# Altium PCB PCB1.PcbDoc (part 3 of 4)
Units mm, origin at the board's own origin, x right, y up, seen from the top; angles counter-clockwise.
Board outline 200 x 55 mm, 4 copper layers (Top Layer, Power Layer, GND Layer, Bottom Layer), stack 1.714 mm thick; 403 components, 272 nets, 1346 pads, 787 vias.
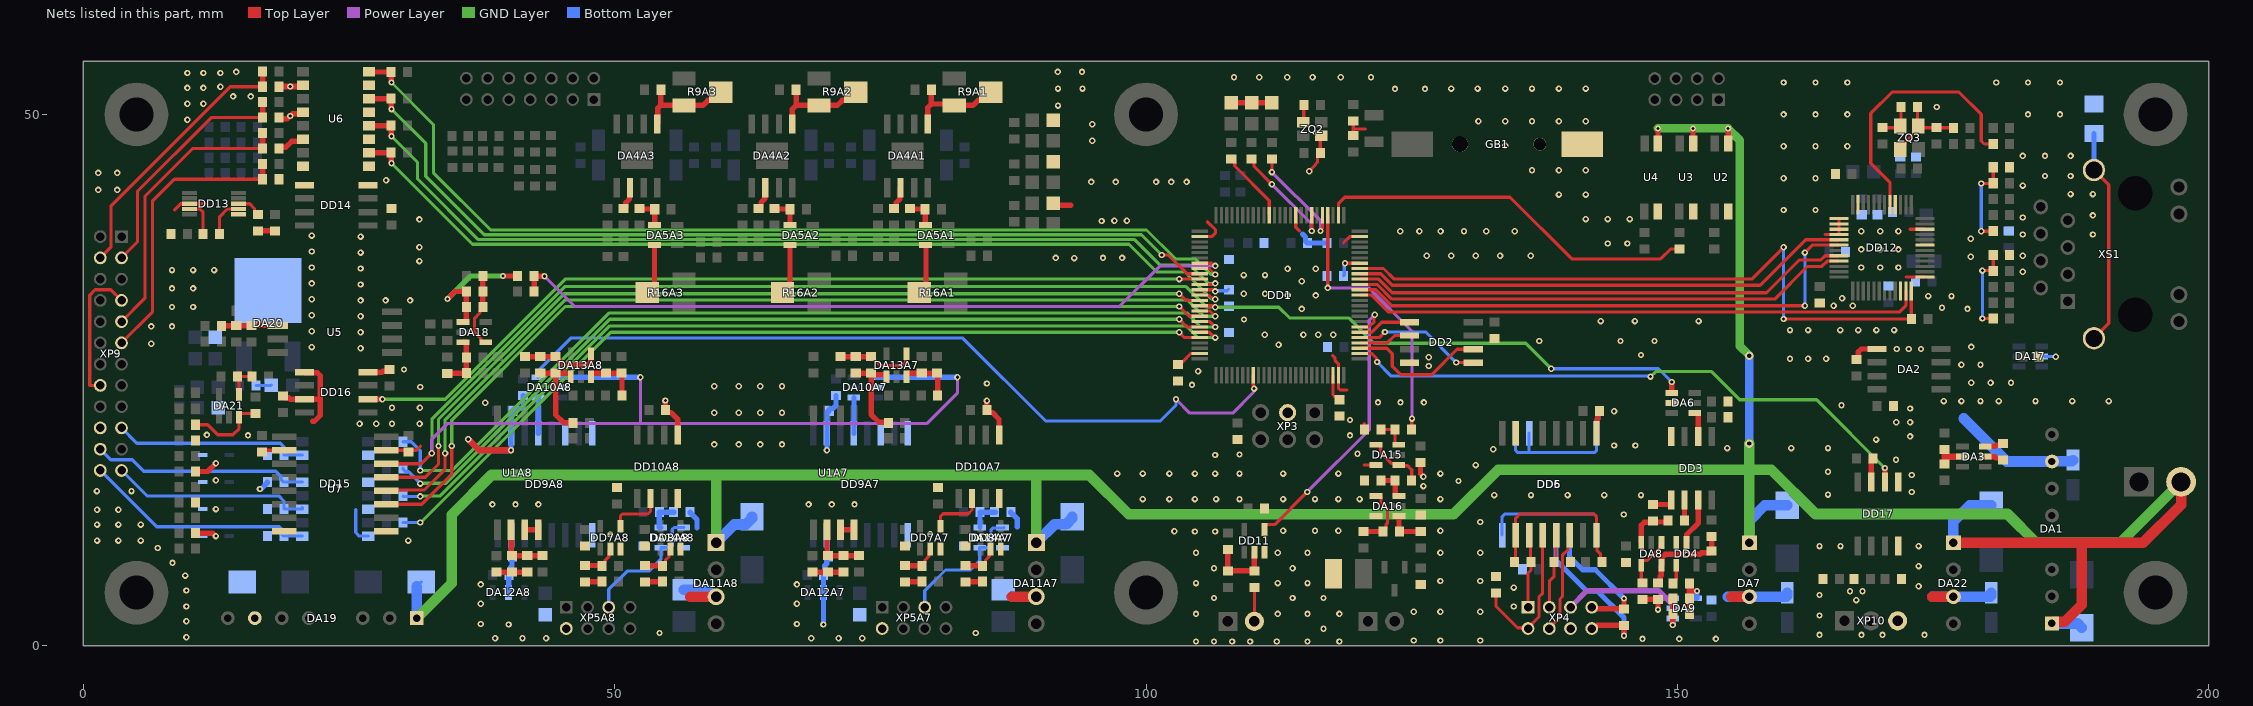
[diagram p5: the nets of this part, all layers, seen from the top]

## Via types
v1: diameter 0.6, hole 0.3, Top Layer to Bottom Layer, tented both sides, 747 vias
v2: diameter 0.6, hole 0.3, Top Layer to Bottom Layer, 36 vias
v3: diameter 0.8, hole 0.4, Top Layer to Bottom Layer, tented both sides, 4 vias

## Nets (pads, with @x,y where several pads share a name; then routed paths per layer and width w, separated by ;. In a path a pad name is that pad's centre, name@x,y a point inside that pad or via, vN(x,y) a via of type N, cw(c..) or ccw(c..) an arc to the next point about the centre after c; other vN are vias at no path point) (continued)
DRV2_SEL_DIG: DA10A8.6 DD1.58 | length 76.6
  Top Layer w0.3: DD1.58@110.1,25.475 110.1,24.356 110.175,24.281 v1(110.175,24.2)
  Power Layer w0.3: v1(102.825,23.2) 104.132,21.893 108.159,21.893 110.118,23.852 110.118,24.143 v1(110.175,24.2)
  Bottom Layer w0.3: DA10A8.6@42.8,25.275 42.8,25.875 45.875,28.95 82.763,28.95 90.563,21.15 101.35,21.15 102.82,22.62 102.82,23.195 v1(102.825,23.2)
EMIS_IND: DD1.2 R48.2 | length 36.2
  Top Layer w0.3: DD1.2@118.1,40.525 118.1,41.607 118.693,42.2 134.256,42.2 140.056,36.4 148.425,36.4 149.35,37.325 R48.2@150.2,37.325
ETH_CS: DD1.92 DD12.29 | length 47.3
  Top Layer w0.3: DD1.92@120.125,35 122.1,35 123.175,33.925 157.789,33.925 162.064,38.2 DD12.29@165.2,38.2
ETH_INT: DD1.88 DD12.47 | length 53.7
  Top Layer w0.3: DD1.88@120.125,33 121.25,33 122.85,31.4 170.89,31.4 171.5,32.01 DD12.47@171.5,33.4
ETH_MISO: DD1.90 DD12.33 | length 47.1
  Top Layer w0.3: DD1.90@120.125,34 121.761,34 123.143,32.618 159.168,32.618 162.25,35.7 163.605,35.7 164.105,36.2 DD12.33@165.2,36.2
ETH_MOSI: DD1.91 DD12.32 | length 47
  Top Layer w0.3: DD1.91@120.125,34.5 121.898,34.5 123.174,33.224 158.387,33.224 161.463,36.3 163.498,36.3 163.898,36.7 DD12.32@165.2,36.7
ETH_RST: DD1.93 DD12.48 R66.1 | length 62.9
  Top Layer w0.3: DD1.93@120.125,35.5 122.35,35.5 123.35,34.5 157,34.5 v1(160,37.5) ; v1(160,30.75) 171.92,30.75 172.02,30.85 172,30.87 DD12.48@172,33.4
  Bottom Layer w0.3: v1(160,30.75) v1(160,37.5)
ETH_SCLK: DD1.89 DD12.30 | length 51
  Top Layer w0.3: DD1.89@120.125,33.5 121.625,33.5 123.125,32 v1(162,32) ; v1(162,37) 162.7,37.7 DD12.30@165.2,37.7
  Bottom Layer w0.3: v1(162,32) v1(162,37)
EXT_AN_MOD: C110.1 DD1.32 R94.2 | length 69.9
  Top Layer w0.3: DD1.32@105.075,36 106.177,36 106.369,35.807 106.468,35.807 v1(106.525,35.75)
  Top Layer w0.5: C110.1@42.425,33.332 R94.2@42.425,34.782 42.429,34.779 43.396,34.779 v1(43.4,34.775)
  Power Layer w0.3: v1(43.4,34.775) 46.25,31.925 97.5,31.925 101.325,35.75 v1(106.525,35.75)
EXT_COM1: DD1.39 DD15.13 | length 86.4
  Top Layer w0.3: DD15.13@28.5,15.86 32.185,15.86 33.425,17.1 v1(33.425,18.8) ; v1(103.125,33.125) 103.75,32.5 DD1.39@105.075,32.5
  GND Layer w0.3: v1(33.425,18.8) 33.425,21.297 45.253,33.125 v1(103.125,33.125)
EXT_COM2: DD1.41 DD15.12 | length 90.5
  Top Layer w0.3: DD15.12@28.5,14.59 28.57,14.66 32.085,14.66 34.05,16.625 v1(34.05,18.125) ; DD1.41@105.075,31.5 106.025,31.5 v1(106.525,31)
  GND Layer w0.3: v1(34.05,18.125) 34.05,21.285 45.29,32.525 103.925,32.525 105.45,31 v1(106.525,31)
EXT_COM3: DD1.42 DD15.11 | length 87.6
  Top Layer w0.3: DD15.11@28.5,13.32 31.845,13.32 34.675,16.15 v1(34.675,18.8) ; v1(103.125,31.925) 104.05,31 DD1.42@105.075,31
  GND Layer w0.3: v1(34.675,18.8) 34.675,21.234 45.366,31.925 v1(103.125,31.925)
EXT_DIG_MOD: DA6.1 DA10A7.1 DA10A8.1 DD1.40 DD15.14 | length 209.4
  Top Layer w0.3: DD15.14@28.5,17.13 31.8,17.13 v1(32.795,18.125) ; DD1.40@105.075,32 106.294,32 106.444,31.85 v1(106.525,31.85)
  Top Layer w0.5: DA6.1@149.475,23.8 v1(149.475,24.825)
  Power Layer w0.3: v1(32.795,18.125) 32.795,19.418 34.302,20.925 52.425,20.925 ; v1@52.425,25.247 52.425,20.925 ; v1(82.25,25.275) 82.25,23.775 79.4,20.925 52.425,20.925
  GND Layer w0.3: v1(32.795,18.125) 32.8,18.13 32.8,21.308 45.292,33.8 103.775,33.8 105.668,31.907 106.468,31.907 v1(106.525,31.85) 112.5,31.85 113.5,30.85 119.062,30.85 121.441,28.471 135.742,28.471 v1(138.138,26.075)
  Bottom Layer w0.3: v1(138.138,26.075) 148.225,26.075 v1(149.475,24.825)
  Bottom Layer w0.5: DA10A8.1@44.95,25.275 v1(52.425,25.275) ; DA10A7.1@74.65,25.275 v1(82.25,25.275)
EXT_FLAG1: DD1.43 R95.2 | length 87
  Top Layer w0.3: DD1.43@105.075,30.5 106.025,30.5 v1(106.525,30)
  GND Layer w0.3: v1(31.7,16.488) 34.67,16.488 49.507,31.325 103.842,31.325 105.167,30 v1(106.525,30)
  Bottom Layer w0.3: R95.2@30.075,19.2 30.867,19.2 31.7,18.367 v1(31.7,16.488)
EXT_FLAG2: DD1.44 R96.2 | length 82.4
  Top Layer w0.3: v1(103.125,30.725) 103.85,30 DD1.44@105.075,30
  GND Layer w0.3: v1(31.7,15.26) 31.728,15.288 34.107,15.288 49.544,30.725 v1(103.125,30.725)
  Bottom Layer w0.3: R96.2@30.075,16.7 30.075,16.65 30.35,16.375 30.617,16.375 31.7,15.292 v1(31.7,15.26)
EXT_FLAG3: DD1.45 R97.2 | length 85.2
  Top Layer w0.3: DD1.45@105.075,29.5 105.964,29.5 106.464,29 v1(106.525,29)
  GND Layer w0.3: v1(31.7,14.06) 31.728,14.088 33.543,14.088 49.555,30.1 103.794,30.1 104.894,29 v1(106.525,29)
  Bottom Layer w0.3: R97.2@30.075,14.1 30.115,14.06 v1(31.7,14.06)
EXT_FLAG4: DD1.46 R98.2 | length 82.6
  Top Layer w0.3: v1(103.125,29.5) 103.625,29 DD1.46@105.075,29
  GND Layer w0.3: v1(31.7,11.6) 31.752,11.6 49.652,29.5 v1(103.125,29.5)
  Bottom Layer w0.3: R98.2@30.075,11.6 v1(31.7,11.6)
EXT_IL1: DD1.33 R86.2 U6.16 | length 92.4
  Top Layer w0.3: DD1.33@105.075,35.5 105.926,35.5 106.488,34.938 v1@106.535,34.938
  Top Layer w0.5: U6.16@26.92,54 R86.2@28.95,54 28.975,53.975 28.975,53.025 v1(29,53)
  GND Layer w0.3: v1(29,53) 32.95,49.05 32.95,44.525 38.35,39.125 100.05,39.125 102.775,36.4 104.642,36.4 106.084,34.958 106.516,34.958 v1@106.535,34.938
  other v1: 106.525,34.938
EXT_IL2: DD1.34 R87.2 U6.14 | length 87.4
  Top Layer w0.3: v1(101.475,36.775) 102.1,36.775 103.875,35 DD1.34@105.075,35
  Top Layer w0.5: U6.14@26.9,51.48 R87.2@28.93,51.48 ; R87.2@28.95,51.5 28.975,51.475 28.975,50.525 v1(29,50.5)
  GND Layer w0.3: v1(29,50.5) 32.225,47.275 32.225,44.175 37.725,38.675 99.575,38.675 v1(101.475,36.775)
EXT_KEY: DD1.36 R89.2 U6.12 | length 88.7
  Top Layer w0.3: DD1.36@105.075,34 106.344,34 106.444,34.1 v1(106.525,34.1)
  Top Layer w0.5: U6.12@26.9,48.94 28.91,48.94 R89.2@28.95,48.9 ; R89.2@28.95,48.94 28.975,48.915 28.975,47.965 v1(29,47.94)
  GND Layer w0.3: v1(29,47.94) 31.45,45.49 31.45,43.95 37.175,38.225 98.925,38.225 101.35,35.8 104.141,35.8 105.841,34.1 v1(106.525,34.1)
EXT_MP_EN: DD1.38 R91.2 U6.10 | length 87.5
  Top Layer w0.3: DD1.38@105.075,33 105.924,33 106.267,32.657 106.468,32.657 v1(106.525,32.6)
  Top Layer w0.5: U6.10@26.9,46.4 R91.2@28.95,46.4 28.975,46.375 28.975,45.425 v1(29,45.4)
  GND Layer w0.3: v1(29,45.4) 36.625,37.775 98.4,37.775 101,35.175 103.641,35.175 106.158,32.657 106.468,32.657 v1(106.525,32.6)
EXT_PMO: DD1.35 DD16.2 | length 83
  Top Layer w0.3: v1(103.125,34.5) DD1.35@105.075,34.5
  Top Layer w0.5: DD16.2@26.8,23.2 v1(28.15,23.2)
  GND Layer w0.3: v1(28.15,23.2) 34.055,23.2 45.355,34.5 v1(103.125,34.5)
FIBER_IL: DD1.82 DD11.4 | length 27.2
  Top Layer w0.3: DD11.4@111.15,10.95 111.15,11.275 111.275,11.4 112.1,11.4 v1(115.175,14.475) ; DD1.82@120.125,30 120.974,30 121.468,30.493 121.468,31.093 v1(121.525,31.15)
  Power Layer w0.3: v1(115.175,14.475) 121,20.3 121,30.625 v1(121.525,31.15)
FLAG1_HW: R111.2 U7.15 XP9.19 | length 18.5
  Bottom Layer w0.3: XP9.19@3.6,20.5 5.05,19.05 18.55,19.05 18.875,18.725 R111.2@18.875,17.94 U7.15@20.6,17.94
FLAG2_HW: R112.2 U7.13 XP9.22 | length 20.4
  Bottom Layer w0.3: XP9.22@1.6,18.5 2.6,17.5 4.6,17.5 5.682,16.418 18.128,16.418 18.6,15.946 18.6,15.675 R112.2@18.875,15.4 U7.13@20.6,15.4
FLAG3_HW: R114.2 U7.11 XP9.23 | length 19
  Bottom Layer w0.3: XP9.23@3.6,16.5 5.996,14.104 18.396,14.104 18.875,13.625 R114.2@18.875,12.86 U7.11@20.6,12.86 ; U7.11@20.585,13.02 U7.11@20.625,12.98
FLAG4_HW: R115.2 U7.9 XP9.24 | length 21.8
  Bottom Layer w0.3: XP9.24@1.6,16.5 6.9,11.2 18.467,11.2 18.643,11.024 18.643,10.552 R115.2@18.875,10.32 U7.9@20.6,10.32
FLOW: DD1.77 DD17.6 | length 55.8
  Top Layer w0.3: DD1.77@120.125,27.5 121.25,27.5 121.693,27.057 121.693,26.757 v1(121.75,26.7)
  Top Layer w0.5: v1(169.525,16.725) 169.532,16.718 169.532,15.407 DD17.6@169.539,15.4
  GND Layer w0.3: v1(147.475,25.325) 147.95,25.8 153.225,25.8 155.875,23.15 163.1,23.15 v1(169.525,16.725)
  Bottom Layer w0.3: v1(121.75,26.7) 123.07,25.38 147.42,25.38 v1(147.475,25.325)
GND: C2.2 C4.1 C5.2 C7.2 C8.2 C9.2 C13.1 C14.1 C15.1 C16.2 C18.2 C19.2 C20.2 C21.2 C22.2 C23.2 C24.2 C25.2 C26.2 C37.2 C38.2 C42.2 C43.2 C56A7.2 C56A8.2 C57A7.2 C57A8.2 C69A7.2 C69A8.2 C73.2 C74.2 C75.2 C77.2 C78.2 C79.2 C80.2 C81.2 C82.2 C83.2 C84.2 C85.2 C86.2 C87.2 C88.2 C89.2 C90.2 C91.2 C92.2 C93.2 C94.2 C95.2 C106.2 C107.2 C109.2 C124.2 DA1.7 DA2.1 DA3.2 DA6.2 DA10A7.2 DA10A8.2 DA15.5 DA16.5 DA17.2 DD1.10 DD1.27 DD1.74 DD1.99 DD2.4 DD3.4 DD5.9 DD5.15 DD6.2 DD6.3 DD6.8 DD9A7.2 DD9A7.6 DD9A7.8 DD9A8.2 DD9A8.6 DD9A8.8 DD10A7.5 DD10A8.5 DD11.3 DD12.1 DD12.7 DD12.10 DD12.16 DD12.23 DD12.25 DD12.26 DD12.27 DD12.28 DD12.46 DD14.4 DD15.9 DD15.15 DD16.4 DD17.5 DD17.7 GB1.1 R1.1 R2.1 R3.1 R4.2 R5.2 R42.2 R45.1 R46.1 R62.1 U2.2 U3.2 U4.2 U6.9 U6.11 U6.13 U6.15 U7.2 U7.4 U7.6 U7.8 VD1.2 VD2.2 VD3.2 XP3.3 XP8.2 ZQ2.2 ZQ2.4 ZQ3.2 ZQ3.4 | length 122.9
  Top Layer w0.3: DD15.15@28.5,18.4 30.45,18.4 C107.2@30.6,18.25 30.757,18.407 31.349,18.407 31.742,18.8 ; C69A7.2@85.025,22.175 C69A7.2@85.038,22.188 ; DD1.27@105.075,38.5 106.176,38.5 106.552,38.876 106.552,39.124 105.776,39.9 ; XP8.2@110.2,2.3 C77.2@110.2,5.5 ; DD1.10@114.1,40.525 114.1,39.374 114.425,39.049 ; ZQ2.2@114.8,49.275 114.85,49.325 C23.2@114.85,50.875 ; v1(115.353,44.653) 115.949,45.249 115.949,45.33 116.125,45.506 116.125,46.1 C25.2@116.4,46.375 116.4,47.875 ZQ2.4@116.5,47.975 ; 117.565,27.308 117.775,27.099 117.775,26.876 118.1,26.551 DD1.74@118.1,25.475 118.1,24.247 118.276,24.071 118.916,24.071 ; 118.587,37.912 119.175,38.5 DD1.99@120.125,38.5 ; C22.2@119.5,48.025 119.5,48.625 ; C24.2@119.5,49.375 119.5,48.625 ; C73.2@120.538,20.35 120.538,20.886 ; 120.545,17.013 DA15.5@121.637,17.013 ; 120.65,48.625 119.5,48.625 ; 163.9,38.7 DD12.28@165.2,38.7 DD12.27@165.2,39.2 DD12.26@165.2,39.7 DD12.25@165.2,40.2 ; ZQ3.4@170.975,46.7 171.425,47.15 171.425,47.375 172.225,48.175 172.225,48.45 172.525,48.75 C85.2@174.375,48.75 175.937,48.75 R62.1@175.975,48.712 ; 171.5,34.7 DD12.1@173.3,34.7 ; 171.9,39.2 DD12.10@173.3,39.2 ; C87.2@172.6,50.7 172.6,48.975 ZQ3.2@172.675,48.9
  Top Layer w0.5: DD16.4@26.8,25.75 28.075,25.75 28.15,25.825 28.625,25.825 C109.2@28.8,26 ; v1(54.775,23.075) C69A8.2@54.775,22.175 54.775,22.125 54.95,21.95 55.3,21.95 55.925,21.325 DD10A8.5@55.925,19.85 ; C69A7.2@85.025,22.175 85.025,22.125 85.2,21.95 85.487,21.95 85.493,21.945 85.55,21.945 86.175,21.319 DD10A7.5@86.175,19.85 ; v1(85.025,23.05) 85.025,22.2 C69A7.2@85.038,22.188 ; R2.1@91.275,41.65 91.475,41.45 92.95,41.45 ; VD1.2@108.025,51.1 VD2.2@109.935,51.1 VD3.2@111.85,51.1 ; C74.2@125.837,17.238 125.837,16.19 126.1,15.927 v1(126.1,15.9) ; DD5.9@142.396,20.01 142.446,20.06 142.446,21.288 142.506,21.348 142.506,21.9 C43.2@142.681,22.075 ; C7.2@166.875,26.95 167.007,27.082 167.007,27.632 167.3,27.925 DA2.1@168.8,27.925 ; DD17.7@168.239,15.4 168.239,17.464 C124.2@168.4,17.625
  Top Layer w0.6: v1(36.225,19.425) 37.25,18.4 v1(40.25,18.4) ; C5.2@175.15,17.125 175.15,17.8 ; C8.2@175.15,18.475 175.15,17.8 ; DA3.2@176.825,17.8 175.15,17.8
  Power Layer w0.6: v1(36.225,19.425) 37.25,18.4 v1(40.25,18.4)
  Bottom Layer w0.3: 25.64,12.8 25.64,10.66 25.976,10.324 U7.8@26.816,10.324 ; DD6.2@134.776,20.01 DD6.2@134.776,20 134.776,18.376 134.952,18.2 136.046,18.2 ; DD6.3@136.046,20.01 DD6.3@136.046,20 136.046,18.2 ; DD6.8@142.396,20.01 DD6.8@142.396,20 142.396,18.376 142.221,18.2 136.046,18.2 ; DA17.2@184.3,27.225 184.312,27.212 185.588,27.212 v1(185.6,27.2)
  Bottom Layer w0.5: v1(40.25,18.4) 40.255,18.405 40.255,19.995 DD9A8.2@40.26,20 40.26,22.003 40.582,22.325 41.244,22.325 41.375,22.456 C56A8.2@41.375,23.55 ; v1(69.975,18.4) DD9A7.2@69.975,20 C57A7.2@69.975,22 ; C57A7.2@70.147,22.078 70.147,22.172 70.3,22.325 70.532,22.325 70.825,22.618 C56A7.2@70.825,23.55 ; 114.734,38.74 115,38.474 115,38.075 C13.1@115.175,37.9 C19.2@117.025,37.9 ; DD6.8@142.396,20.01 142.446,20.06 142.446,21.291 142.506,21.351 142.506,21.9 C42.2@142.681,22.075
  Bottom Layer w1: 176.961,21.389 181.01,17.34 DA1.7@185.25,17.34 ; DA1.7@185.25,17.35 187.1,17.35 C2.2@187.225,17.475
  other v1: 104.7,0.4 106.4,0.4 108.1,0.4 109.8,0.4 112.3,0.4 115.2,0.4 118.2,0.4 125.2,0.5 127.7,0.5 116.7,1.6 104.7,3 112.4,3 115.2,3 118.2,3 125.2,3.2 127.7,3.2 106.4,4.5 113.8,4.5 116.7,4.5 104.7,5.9 112.4,5.9 115.2,5.9 127.7,6.1 106.4,7.3 113.8,7.3 104.7,8.75 112.4,8.75 115.2,8.75 127.7,8.75 30.575,9.9 104.6,10.75 106.5,10.75 102.675,10.775 112.9,10.825 115.9,10.825 118.1,10.825 127.7,10.825 99.7,13.8 102.2,13.8 104.6,13.8 106.6,13.8 108.8,13.8 112.9,13.8 115.9,13.8 118.1,13.8 120.1,13.8 127.7,13.8 164.175,14.225 172.05,14.475 126.1,15.025 129.4,15.5 172.05,16.075 97.3,16.2 99.7,16.2 102.2,16.2 104.6,16.2 106.5,16.2 108.8,16.2 112.9,16.2 118.1,16.2 127.7,16.2 164.175,16.375 131.025,17 170.575,17.5 106.5,17.95 108.8,18 119.9,18.075 132.681,18.5 154.7,18.6 160.725,18.6 164.175,18.6 144.05,18.85 146.05,18.85 59.375,18.95 61.675,18.95 63.7,18.95 65.75,18.95 168.7,19.4 171.9,19.7 119.2,19.8 26,20.9 27.575,20.9 29.05,20.9 31.65,20.9 170.6,21.025 171.9,21.025 119.2,21.25 59.375,21.925 61.675,21.925 63.7,21.925 65.75,21.925 144.05,22.075 171.9,22.325 29.05,22.4 31.675,22.4 165.45,22.625 37.818,22.872 121.825,22.9 123.95,22.9 126.15,22.9 175.075,23.025 176.725,23.025 178.525,23.025 180.25,23.025 183.7,23.025 187.15,23.025 190.6,23.025 31.7,24.35 59.375,24.425 61.675,24.425 63.7,24.425 65.75,24.425 104.325,24.55 85.025,24.675 177.65,24.75 179.475,24.75 181.4,24.75 104.9,25.825 30.175,26 126.6,26.325 176.725,26.45 178.525,26.45 160.6,27 162.3,27 164,27 126.6,27.15 146.575,27.358 170.65,27.925 171.775,27.925 172.925,27.925 26.1,28 177.65,28.125 112.475,28.325 137,28.675 144.65,28.675 147.85,28.675 111.175,29.262 114.812,29.262 116.2,29.262 117.625,29.262 26.1,29.5 160.6,29.7 162.3,29.7 165.325,29.7 167.025,29.7 168.725,29.7 170.4,29.7 142.8,30.55 146,30.55 152,30.55 109.225,30.7 26.1,31 114.65,31.7 177.3,31.7 174.9,31.8 164.7,32 166.5,32 26.1,32.5 28.45,32.5 30.75,32.5 165.5,32.7 173.6,32.9 175.8,32.9 113.325,32.975 115.975,32.975 109.2,33.125 111.2,33.125 26.1,34 114.65,34.3 109.2,34.875 111.2,34.875 182.5,35.2 113.325,35.475 115.975,35.475 26.1,35.5 167.3,35.6 169.1,35.6 170.8,35.6 31.625,36.2 93.25,36.475 91.5,36.5 95.95,36.5 97.75,36.5 177.6,36.6 126.425,36.7 128.725,36.7 131.025,36.7 133.325,36.7 136.2,36.7 182.5,36.7 26.1,37 167.3,37.3 169.1,37.3 170.8,37.3 31.625,37.5 143.45,37.85 145.3,37.85 177.6,38.3 26.1,38.5 182.5,38.7 189.1,38.7 123.925,39 125.725,39 127.725,39 129.925,39 132.025,39 134.7,39 167.3,39 169.1,39 170.8,39 95.825,39.975 97.025,40 98.2,40 31.625,40.125 141.375,40.15 143.45,40.15 145.525,40.15 182.5,40.3 189.1,40.5 160,41 163,41 138.85,42.45 141.375,42.45 187,42.5 189.1,42.5 182.5,43.3 94.85,43.65 97.15,43.65 100.95,43.65 102.375,43.65 103.825,43.65 28.5,43.805 160,44 163,44 184.6,44.2 187,44.2 136.325,44.75 138.85,44.75 141.375,44.75 182.5,46.1 184.6,46.1 187,46.1 160,47 163,47 166,47 133.8,47.05 94.95,47.525 94.95,49.075 131.275,49.35 133.8,49.35 136.325,49.35 138.85,49.35 141.375,49.35 160,50 163,50 166,50 183,50 186,50 174.4,50.7 91.725,50.825 123.425,52.4 126.25,52.4 91.725,52.425 94.025,52.425 128.725,52.425 131.2,52.425 133.8,52.425 136.325,52.425 138.85,52.425 141.375,52.425 160,53 163,53 166,53 180,53 183,53 186,53 108.275,53.5 110.65,53.5 113.3,53.5 115.675,53.5 118.325,53.5 121.175,53.5 91.7,54 93.975,54
GND_24V: C1.2 C39.2 C51A7.2 C51A8.2 C111.2 C120.2 DA1.1 DA7.1 DA11A7.1 DA11A8.1 DA19.1 DA22.1 U2.3 U3.3 U4.3 XP2.2 | length 309.6
  Top Layer w0.5: U4.3@148.175,47.275 v1(148.175,48.675) ; U3.3@151.475,47.275 v1(151.475,48.675) ; U2.3@154.775,47.275 v1(154.775,48.675)
  Top Layer w1: DA22.1@175.975,9.695 188.05,9.695 ; DA1.1@185.25,2.12 185.38,2.25 186.437,2.25 188.05,3.863 188.05,9.695 ; XP2.2@197.4,15.425 197.4,13.275 193.82,9.695 188.05,9.695
  GND Layer w0.8: v1(148.175,48.675) v1(151.475,48.675) v1(154.775,48.675) 155.875,47.575 155.875,28.2 v3(156.775,27.3)
  GND Layer w1: DA19.1@31.38,2.6 34.675,5.895 34.675,12.333 38.417,16.075 59.55,16.075 ; DA11A8.1@59.55,9.695 59.55,16.075 ; DA11A7.1@89.675,9.705 89.675,16.075 ; v3(156.775,19.025) 156.781,19.019 156.781,16.575 ; DA7.1@156.781,9.7 156.781,16.575 ; XP2.2@197.4,15.425 191.67,9.695 183.772,9.695 181.067,12.4 162.998,12.4 158.823,16.575 156.781,16.575 ; 59.55,16.075 89.675,16.075 ; 89.675,16.075 94.675,16.075 98.376,12.374 128.939,12.374 133.14,16.575 156.781,16.575
  Bottom Layer w0.3: C111.2@31.38,5.58 C111.2@31.8,6
  Bottom Layer w0.8: v3(156.775,19.025) v3(156.775,27.3)
  Bottom Layer w1: DA19.1@31.38,2.6 C111.2@31.38,5.58 ; DA11A8.1@59.55,9.695 61.264,11.409 62.325,11.409 62.925,12.009 C51A8.2@62.925,12.15 ; DA11A7.1@89.675,9.705 91.389,11.419 92.475,11.419 93.075,12.019 C51A7.2@93.075,12.15 ; DA7.1@156.781,9.7 156.781,11.781 158.225,13.225 C39.2@160.35,13.225 ; DA22.1@175.975,9.695 175.975,11.7 177.5,13.225 C120.2@179.525,13.225 ; DA1.1@185.25,2.1 187.65,2.1 C1.2@188.05,1.7
GND_DRVA7: C52A7.2 C53A7.2 C54A7.2 C55A7.1 C58A7.2 C59A7.2 C60A7.2 C63A7.1 C64A7.2 C65A7.2 C67A7.2 C68A7.2 C71A7.2 DA11A7.3 DA12A7.2 DA14A7.5 DD7A7.3 DD8A7.3 DD9A7.9 DD9A7.15 DD10A7.4 R28A7.1 R29A7.1 R33A7.2 U1A7.3 U1A7.4 XP5A7.2 | length 20
  Top Layer w0.5: C54A7.2@68.625,6.925 C55A7.1@70.075,6.925 R33A7.2@71.525,6.925 ; U1A7.3@71.25,10.925 U1A7.4@72.525,10.925 ; C52A7.2@77.325,6 77.35,6.025 78.9,6.025 R28A7.1@78.925,6.05 ; C53A7.2@83,6 83.025,6.025 84.6,6.025 R29A7.1@84.625,6.05
  Top Layer w1: 87.361,4.625 DA11A7.3@89.675,4.625
  Bottom Layer w0.5: v1(69.645,2.003) 69.66,2.019 DA12A7.2@69.66,5.025 ; DA12A7.2@69.65,5.025 69.65,5.1 C68A7.2@69.65,6.65 ; C68A7.2@69.675,6.675 69.769,6.769 69.769,7.542 69.95,7.722 69.95,8.25 C65A7.2@70.125,8.425 ; DD9A7.15@69.975,10.4 70.025,10.35 70.025,8.5 C65A7.2@70.1,8.425 ; C67A7.2@87.275,12.575 87.275,12.525 87.45,12.35 87.5,12.35 87.875,11.975 87.875,11.175
  other v1: 68.5,0.7 71.075,0.7 73.3,0.7 83.975,1.2 67.15,2.05 67.15,3.95 67.15,5.775 79.7,10.5 68.25,13.3 70.425,13.3 72.575,13.3
GND_DRVA8: C52A8.2 C53A8.2 C54A8.2 C55A8.1 C58A8.2 C59A8.2 C60A8.2 C63A8.1 C64A8.2 C65A8.2 C67A8.2 C68A8.2 C71A8.2 DA11A8.3 DA12A8.2 DA14A8.5 DD7A8.3 DD8A8.3 DD9A8.9 DD9A8.15 DD10A8.4 R28A8.1 R29A8.1 R33A8.2 U1A8.3 U1A8.4 XP5A8.2 | length 20.6
  Top Layer w0.5: C54A8.2@38.875,6.925 C55A8.1@40.325,6.925 R33A8.2@41.775,6.925 ; U1A8.3@41.535,10.925 U1A8.4@42.81,10.925 ; C52A8.2@47.225,6 47.25,6.025 48.8,6.025 R28A8.1@48.825,6.05 ; C53A8.2@52.875,6 52.9,6.025 54.475,6.025 R29A8.1@54.5,6.05
  Top Layer w1: 57.125,4.615 DA11A8.3@59.55,4.615
  Bottom Layer w0.5: DA12A8.2@40.025,5.025 40.025,5.1 C68A8.2@40.025,6.65 ; C68A8.2@40.05,6.725 C68A8.2@40.05,6.675 40.225,6.85 40.225,7.409 40.34,7.524 C65A8.2@40.34,8.36 ; DD9A8.15@40.26,10.4 40.26,8.44 C65A8.2@40.34,8.36 ; C65A8.2@40.375,8.325 C65A8.2@40.34,8.36 ; C65A8.2@40.4,8.425 40.34,8.365 C65A8.2@40.34,8.36 ; C67A8.2@57.1,12.575 57.1,12.525 57.75,11.875 57.75,11.075
  Bottom Layer w1: C58A8.2@56.525,5.275 58.728,5.275 59.388,4.615 DA11A8.3@59.55,4.615
  other v1: 38.75,0.7 41.325,0.7 43.55,0.7 54.225,1.2 40.025,2 37.4,2.05 37.4,3.95 37.4,5.775 49.6,10.475 38.5,13.3 40.675,13.3 42.825,13.3
GND_FS: C121.2 C122.2 C123.2 DA22.3 DD17.4 R116.2 XP10.3 | length 7.9
  Top Layer w1: 173.975,4.615 DA22.3@175.975,4.615
  Bottom Layer w1: 173.975,4.615 DA22.3@175.975,4.615 179.425,4.615 179.525,4.715 C123.2@179.525,5
  other v1: 163.375,1.025 167.325,1.025 169.3,1.025 173.25,1.025 163.375,2.85 166.825,4.3 163.375,4.775 166.25,5.125 167.425,5.125 172.7,5.6 172.7,7.5 163.375,9.375 165.35,9.375 172.7,9.375
GND_HW: C96.2 C97.2 C101.2 C102.2 C112.1 C113.2 C114.2 C115.2 DA19.7 DA20.2 DD13.1 DD13.8 DD14.5 DD15.2 DD15.8 DD16.5 DD16.7 R67.1 R68.1 R70.1 R71.1 R73.1 R74.1 R75.1 R77.1 R108.1 R110.1 R111.1 R112.1 R114.1 R115.1 U6.2 U6.4 U6.6 U6.8 VD4.2 VD5.2 VD6.2 VD7.2 XP9.7 XP9.16 XP9.20 | length 46.5
  Top Layer w0.3: XP9.16@1.6,24.5 0.6,24.5 0.6,33 1.1,33.5 2.6,33.5 XP9.7@3.6,32.5 ; 8.575,41 9.175,41.6 11.443,41.6 ; C102.2@16.764,18.4 DD15.2@18.9,18.4 ; R67.1@18.404,52.621 18.534,52.75 U6.2@20.68,52.75 U6.2@20.53,52.6
  Top Layer w0.5: R77.1@10.575,10.6 12.168,10.6 12.448,10.32 v1(12.475,10.32) ; R71.1@10.575,16.4 11.698,16.4 v1(12.477,17.179) ; C97.2@16.425,39.05 C101.2@18.025,39.05 ; R73.1@18.425,46.65 18.425,46.75 18.6,46.925 19.075,46.925 19.615,47.465 20.475,47.465 U6.6@20.68,47.67 ; R70.1@18.425,49.6 19.223,49.6 v1(19.475,49.85) 19.503,49.851 19.706,50.054 20.524,50.054 U6.4@20.68,50.21 ; R67.1@18.425,52.6 U6.2@20.53,52.6 ; C113.2@18.8,23.5 18.975,23.325 19.328,23.325 19.453,23.2 DD16.7@20.8,23.2 22.3,23.2 ; DD16.5@20.8,25.75 20.85,25.7 22.007,25.7 22.3,25.407 22.3,23.2 ; 21.582,21.125 21.741,21.125 22.3,21.684 22.3,23.2
  Bottom Layer w0.3: C114.2@16.25,24.5 17.665,24.5 C112.1@17.7,24.535
  Bottom Layer w0.5: v1(16.621,14.75) 16.64,14.769 16.744,14.769 17.325,15.35 R112.1@17.325,15.4
  other v1: 9.7,0.8 9.7,2.3 9.7,3.7 9.7,5.2 9.6,6.6 8.4,7.8 7,9.2 1.3,9.9 3.3,9.9 5.4,9.9 1.3,11.4 3.3,11.4 5.4,11.4 1.3,12.8 3.3,12.8 12.475,12.86 1.283,14.55 4.537,14.55 12.475,15.575 15.5,19.8 11.632,19.845 21.502,28.1 6.4,28.425 21.502,29.6 6.4,30.05 8.35,30.05 21.502,31.1 8.35,31.875 10.331,31.875 21.502,32.6 8.35,33.625 10.331,33.625 21.502,34.1 8.35,35.35 10.331,35.35 12.312,35.35 21.502,35.6 21.502,37.1 21.502,38.6 1.4,42.9 3.2,42.9 1.4,44.5 3.2,44.5 9.8,49.5 9.8,51 11.3,51 14.1,51.7 15.75,51.7 9.8,52.5 11.3,52.5 12.9,52.6 19.475,52.625 9.8,53.9 11.3,53.9 12.9,53.9 14.4,54
GND_PS: C40.2 C41.2 C44.2 C45.2 C46.2 C47.2 C48.2 C49.2 DA7.3 DA8.5 DA9.2 DD3.5 DD4.3 DD5.2 DD5.8 DD6.9 DD6.16 R22.1 R24.1 R25.2 R26.1 XP4.6 | length 47.4
  Top Layer w0.3: R22.1@134.681,7.875 134.776,7.971 DD5.2@134.776,10.41 134.776,12.013 135.163,12.4 142.124,12.4 142.396,12.128 DD5.8@142.396,10.41 142.424,10.382 142.424,8.985 142.781,8.628 C47.2@142.781,8.325 ; C47.2@142.881,8.15 C47.2@143.156,7.875
  Top Layer w0.5: C44.2@147.725,13.3 149.275,13.3 149.425,13.45 DD3.5@149.425,13.7 ; R25.2@148.175,5.925 148.225,5.925 148.4,6.1 148.4,6.535 148.475,6.61 148.475,7.55 DA8.5@148.5,7.575 ; DA8.5@148.525,7.6 148.525,8.275 148.85,8.6 152.116,8.6 152.266,8.75 153.05,8.75 C45.2@153.225,8.925 C40.2@153.225,10.275
  Top Layer w1: 155.081,4.62 DA7.3@156.781,4.62
  Bottom Layer w0.3: DD6.16@133.506,10.41 133.506,12.15 133.756,12.4 142.124,12.4 142.396,12.128 DD6.9@142.396,10.41
  Bottom Layer w1: 154.75,4.6 154.77,4.62 DA7.3@156.781,4.62 160.25,4.62 160.35,4.72 C41.2@160.35,5
  other v1: 131.45,0.5 146.725,0.65 150.175,0.65 153.625,0.65 131.45,3.2 134.6,3.7 134.6,5.475 131.45,6.1 150.875,8.6 131.45,8.75 131.45,11.65 144.95,12.35 132.775,14.175 136.225,14.175 139.675,14.175 143.125,14.175 146.575,14.175
GUIDE_LAS: DD1.4 R40.1 | length 25.7
  Top Layer w0.3: v1(117.1,33.675) DD1.4@117.1,40.525 ; R40.1@125,20.35 125.012,20.362 125.012,21.362 v1(125.025,21.375)
  Power Layer w0.3: v1(117.1,33.675) 120.966,33.675 125.025,29.616 v1(125.025,21.375)
IL1_HW: R67.2 R80.1 XP9.4 | length 25.8
  Top Layer w0.3: XP9.4@1.6,36.5 2.6,37.5 2.6,41.376 13.824,52.6 R67.2@16.949,52.6
  Top Layer w0.5: R67.2@16.875,52.6 R80.1@16.875,54.1
IL2_HW: R70.2 R81.1 XP9.3 | length 23
  Top Layer w0.3: XP9.3@3.6,36.5 5.1,38 5.1,42.77 12.03,49.7 R70.2@16.875,49.7
  Top Layer w0.5: R70.2@16.875,49.6 R81.1@16.875,51.1
KEY_HW: R73.2 R82.1 XP9.9 | length 26.9
  Top Layer w0.3: XP9.9@3.6,30.5 5.8,32.7 5.8,42.279 10.321,46.8 R73.2@16.875,46.8
  Top Layer w0.5: R73.2@16.875,46.8 R82.1@16.875,48.1
LED1: DD1.15 R6.1 | length 6.8
  Top Layer w0.3: R6.1@108.025,45.8 108.068,45.8 108.343,45.525 108.343,45.144 111.6,41.887 DD1.15@111.6,40.525
LED2: DD1.7 R7.1 | length 10.6
  Top Layer w0.3: R7.1@109.935,45.8 110.173,45.562 110.173,45.102 v1(111.85,43.425) ; v1(115.6,39.025) DD1.7@115.6,40.525
  Power Layer w0.3: v1(111.85,43.425) 115.543,39.732 115.543,39.082 v1(115.6,39.025)
LED3: DD1.5 R8.1 | length 10.2
  Top Layer w0.3: v1(111.85,44.575) R8.1@111.85,45.8 ; v1(116.425,39.025) 116.425,39.106 116.6,39.281 DD1.5@116.6,40.525
  Power Layer w0.3: v1(111.85,44.575) 116.425,40 v1(116.425,39.025)
LNKn: DD12.17 R61.2 | length 25.2
  Top Layer w0.3: DD12.17@170,41.5 170,43.6 168.2,45.4 168.2,50.1 170.2,52.1 176.5,52.1 178.6,50 178.6,47.5 178.888,47.212 R61.2@179.725,47.212
MEM_CS: DD1.81 DD2.1 | length 5.1
  Top Layer w0.3: DD1.81@120.125,29.5 121.225,29.5 122.171,30.446 DD2.1@124.796,30.446
MEM_MISO: DD1.79 DD2.2 | length 5
  Top Layer w0.3: DD1.79@120.125,28.5 122.699,28.5 123.394,29.196 DD2.2@124.796,29.196
MEM_MOSI: DD1.80 DD2.5 | length 12.1
  Top Layer w0.3: DD1.80@120.125,29 121.939,29 122.464,29.525 v1(122.475,29.525) ; v1(129.2,26.65) 129.202,26.648 130.793,26.648 DD2.5@130.796,26.646
  Bottom Layer w0.3: v1(122.475,29.525) 126.325,29.525 v1(129.2,26.65)
MEM_SCLK: DD1.78 DD2.6 | length 13.4
  Top Layer w0.3: DD1.78@120.125,28 122.662,28 123.178,27.484 123.178,26.306 123.984,25.5 126.874,25.5 129.269,27.896 DD2.6@130.796,27.896
MP_EN_HW: R75.2 R83.1 XP9.11 | length 27.3
  Top Layer w0.3: XP9.11@3.6,28.5 6.5,31.4 6.5,41.83 8.57,43.9 R75.2@16.875,43.9
  Top Layer w0.5: R75.2@16.875,43.8 R75.2@16.875,43.9 R83.1@16.875,45.35
NetC6_1: C6.1 DA3.5 | length 1.8
  Top Layer w0.5: DA3.5@178.975,17.8 179,17.775 179.875,17.775 179.975,17.675 180.475,17.675 C6.1@180.625,17.525
NetC6_2: C6.2 DA3.6 | length 1.8
  Top Layer w0.5: DA3.6@178.975,18.75 179,18.775 179.883,18.775 179.983,18.875 180.45,18.875 C6.2@180.625,19.05
NetC16_1: C16.1 DD1.49 | length 2.5
  Top Layer w0.3: C16.1@103.025,26.45 103.3,26.725 103.451,26.725 104.226,27.5 DD1.49@105.075,27.5
NetC18_1: C18.1 DD1.73 | length 2.7
  Top Layer w0.3: DD1.73@117.6,25.475 117.6,23.601 117.776,23.425 117.875,23.425 118.2,23.1 C18.1@118.2,23.075
NetC27A1_1: C27A1.1 DA4A1.1 R9A1.2 R9A1.3 | length 9.5
  Top Layer w0.5: DA4A1.1@79.45,49.105 79.45,50.63 79.8,50.98 ; C27A1.1@79.8,52.325 79.8,50.98 ; R9A1.2@85.4,52.075 84.65,51.325 84.185,51.325 83.71,50.85 R9A1.3@81.95,50.85 81.82,50.98 79.8,50.98
NetC27A2_1: C27A2.1 DA4A2.1 R9A2.2 R9A2.3 | length 9.5
  Top Layer w0.5: DA4A2.1@66.716,49.105 66.724,49.113 66.724,50.499 67.075,50.85 ; C27A2.1@67.075,52.325 67.075,50.85 ; R9A2.2@72.675,52.075 71.925,51.325 71.425,51.325 70.959,50.859 69.234,50.859 R9A2.3@69.225,50.85 67.075,50.85
NetC27A3_1: C27A3.1 DA4A3.1 R9A3.2 R9A3.3 | length 9.5
  Top Layer w0.5: DA4A3.1@54,49.105 54.05,49.155 54.05,50.575 54.12,50.645 54.19,50.715 54.35,50.875 ; C27A3.1@54.35,52.325 54.35,50.875 ; R9A3.2@59.975,52.075 59.225,51.325 58.775,51.325 58.3,50.85 R9A3.3@56.525,50.85 54.35,50.85 54.35,50.875
NetC33A1_1: C33A1.1 DA5A1.1 R15A1.2 | length 3.1
  Top Layer w0.5: R15A1.2@77.775,41.125 77.8,41.1 79.2,41.1 C33A1.1@79.225,41.075 79.225,39.625 DA5A1.1@79.25,39.6 DA5A1.1@79.4,39.6
NetC33A2_1: C33A2.1 DA5A2.1 R15A2.2 | length 3.1
  Top Layer w0.5: R15A2.2@65.05,41.125 65.075,41.1 66.475,41.1 C33A2.1@66.5,41.075 66.5,39.625 66.525,39.6 DA5A2.1@66.65,39.6
NetC33A3_1: C33A3.1 DA5A3.1 R15A3.2 | length 3
  Top Layer w0.5: R15A3.2@52.325,41.125 52.35,41.1 C33A3.1@53.9,41.1 ; DA5A3.1@53.775,39.625 C33A3.1@53.775,41.075
NetC44_1: C44.1 DA8.3 R19.2 | length 4.5
  Top Layer w0.5: DA8.3@146.6,9.725 146.6,11.329 146.893,11.621 147.596,11.621 C44.1@147.725,11.75 ; C44.1@147.575,11.65 149.1,11.65 R19.2@149.125,11.675
NetC50_1: C50.1 DA9.4 R23.1 R27.2 | length 4.3
  Top Layer w0.5: C50.1@151.125,2.975 R23.1@151.125,5.868 ; 151.168,5.15 v1(151.85,5.15)
  Bottom Layer w0.5: DA9.4@151.725,4.475 151.806,4.475 151.831,4.5 151.831,5.131 v1(151.85,5.15)
NetC50_2: C50.2 DA9.1 R27.1 XP4.5 | length 15.8
  Top Layer w0.5: v1(149.575,1.95) C50.2@149.575,2.975 R27.1@149.575,4.425
  Power Layer w0.5: XP4.5@139.95,3.625 141.509,5.184 148.223,5.184 149.575,3.832 v1(149.575,1.95)
  Bottom Layer w0.5: v1(149.575,1.95) DA9.1@149.575,2.575
NetC52A7_1: C52A7.1 DD7A7.2 R31A7.2 | length 3.5
  Top Layer w0.3: R31A7.2@78.925,7.5 79.2,7.775 79.2,8.045 79.575,8.42 79.575,8.975 DD7A7.2@79.7,9.1
  Top Layer w0.5: C52A7.1@77.325,7.55 77.35,7.525 R31A7.2@78.9,7.525
NetC52A8_1: C52A8.1 DD7A8.2 R31A8.2 | length 3.5
  Top Layer w0.3: R31A8.2@48.775,7.55 R31A8.2@48.825,7.5 49.1,7.775 49.1,8.042 49.475,8.417 49.475,8.975 DD7A8.2@49.6,9.1
  Top Layer w0.5: C52A8.1@47.225,7.55 R31A8.2@48.775,7.55
NetC53A7_1: C53A7.1 DD8A7.2 R32A7.2 | length 3.6
  Top Layer w0.3: R32A7.2@84.625,7.5 84.9,7.775 84.9,8.062 85.25,8.412 85.25,8.975 DD8A7.2@85.375,9.1
  Top Layer w0.5: C53A7.1@83,7.55 83.025,7.525 84.6,7.525 R32A7.2@84.625,7.5
NetC53A8_1: C53A8.1 DD8A8.2 R32A8.2 | length 3.6
  Top Layer w0.3: R32A8.2@54.5,7.5 54.775,7.775 54.775,8.055 55.125,8.405 55.125,8.975 DD8A8.2@55.225,9.075
  Top Layer w0.5: C53A8.1@52.875,7.55 52.9,7.525 54.475,7.525 R32A8.2@54.5,7.5 ; DD8A8.2@55.225,9.075 DD8A8.2@55.25,9.1
NetC55A7_2: C55A7.2 R30A7.1 R33A7.1 U1A7.2 | length 5.5
  Top Layer w0.5: U1A7.2@69.975,11.1 69.975,8.475 71.425,8.475 R30A7.1@72.875,8.475
NetC55A8_2: C55A8.2 R30A8.1 R33A8.1 U1A8.2 | length 5.4
  Top Layer w0.5: U1A8.2@40.26,10.925 40.26,8.54 C55A8.2@40.325,8.475 R33A8.1@41.775,8.475 R30A8.1@43.225,8.475
NetC62A7_1: C62A7.1 DA13A7.3 R34A7.2 R36A7.1 | length 5.2
  Top Layer w0.5: DA13A7.3@77.475,25.325 77.475,25.525 77.6,25.65 R36A7.1@78.9,25.65 C62A7.1@80.35,25.65 80.4,25.6 R34A7.2@80.4,23.55
NetC62A8_1: C62A8.1 DA13A8.3 R34A8.2 R36A8.1 | length 5.2
  Top Layer w0.5: DA13A8.3@47.775,25.325 47.775,25.525 47.9,25.65 R36A8.1@49.2,25.65 C62A8.1@50.65,25.65 50.7,25.6 R34A8.2@50.7,23.55
NetC67A7_1: C67A7.1 DA14A7.3 R37A7.2 | length 2.8
  Bottom Layer w0.5: DA14A7.3@84.375,11.15 R37A7.2@84.375,12.575 ; R37A7.2@84.475,12.575 C67A7.1@85.825,12.575
NetC67A8_1: C67A8.1 DA14A8.3 R37A8.2 | length 2.9
  Bottom Layer w0.5: DA14A8.3@54.35,11.125 54.225,11.125 54.2,11.15 R37A8.2@54.2,12.575 C67A8.1@55.55,12.575
NetC70A7_1: C70A7.1 DA13A7.4 R35A7.2 R38A7.2 | length 7.5
  Top Layer w0.3: R38A7.2@74.191,27.2 74.466,26.925 74.466,26.875 74.972,26.369 77.069,26.369 77.369,26.669 77.369,27.369 DA13A7.4@77.475,27.475
  Top Layer w0.5: R35A7.2@71.241,27.2 C70A7.1@72.691,27.2 R38A7.2@74.191,27.2
NetC70A7_2: C70A7.2 DA13A7.1 R38A7.1 R39A7.1 | length 8.9
  Top Layer w0.5: C70A7.2@72.691,25.65 R38A7.1@74.141,25.65 ; DA13A7.1@75.575,25.325 75.575,25.478 75.55,25.503 74.288,25.503 R38A7.1@74.141,25.65 ; R39A7.1@75.75,20.975 75.688,21.037 74.868,21.037 74.141,21.764 R38A7.1@74.141,25.65
NetC70A8_1: C70A8.1 DA13A8.4 R35A8.2 R38A8.2 | length 7.5
  Top Layer w0.5: R35A8.2@41.548,27.188 C70A8.1@42.998,27.188 ; C70A8.1@43.01,27.2 R38A8.2@44.5,27.2 ; R38A8.2@44.45,27.2 R38A8.2@44.5,27.2 ; DA13A8.4@47.775,27.475 47.75,27.45 47.75,26.718 47.457,26.425 45.225,26.425 44.675,26.975 44.675,27.025 R38A8.2@44.5,27.2
NetC70A8_2: C70A8.2 DA13A8.1 R38A8.1 R39A8.1 | length 9
  Top Layer w0.5: C70A8.2@43,25.65 R38A8.1@44.45,25.65 ; DA13A8.1@45.875,25.325 45.875,25.525 45.75,25.65 R38A8.1@44.45,25.65 ; R39A8.1@46.075,20.975 46.053,20.997 45.193,20.997 44.45,21.74 R38A8.1@44.45,25.65
NetC73_1: C73.1 DA15.3 R40.2 | length 3.1
  Top Layer w0.3: C73.1@122.075,20.35 123.425,20.35 123.425,19.038 123.55,18.913 DA15.3@123.787,18.913
NetC76_1: C76.1 DA16.1 R43.1 | length 3.5
  Top Layer w0.5: DA16.1@123.8,12.2 123.8,10.828 C76.1@123.871,10.757 R43.1@125.85,10.757 R43.1@125.871,10.757
NetC76_2: C76.2 DA16.4 R44.1 | length 6.1
  Top Layer w0.3: DA16.4@121.65,14.207 121.975,14.207 122.1,14.082 122.1,13.907 122.1,13.5 122.731,12.869 122.731,11.583 122.596,11.447 122.596,11.032 C76.2@122.321,10.757
  Top Layer w0.5: R44.1@120.471,10.757 C76.2@122.321,10.757
NetC77_1: C77.1 DD11.2 R50.2 R51.1 | length 6.3
  Top Layer w0.5: R51.1@107.7,9.05 R50.2@107.7,7.05 C77.1@110.2,7.05 DD11.2@110.2,8.8
NetC80_1: C80.1 XS1.13 XS1.14 | length 20.4
  Top Layer w0.3: XS1.13@189.2,28.932 190.6,30.332 190.6,43.372 XS1.14@189.2,44.772
  Bottom Layer w0.5: XS1.14@189.2,44.772 C80.1@189.2,48.2
NetC82_1: C82.1 R52.2 R53.2 | length 8.1
  Top Layer w0.3: v1(178.7,30.8) 179.703,30.8 R52.2@179.725,30.778 ; v1(178.7,35.3) 179.703,35.3 R53.2@179.725,35.278 C82.1@179.725,36.778
  Bottom Layer w0.3: v1(178.7,30.8) v1(178.7,35.3)
NetC83_1: C83.1 R54.2 R55.2 | length 8.3
  Top Layer w0.3: v1(178.6,39) 179.7,39 R54.2@179.725,39.025 ; v1(178.6,43.5) 179.7,43.5 R55.2@179.725,43.525 C83.1@179.725,45.025
  Bottom Layer w0.3: v1(178.6,39) v1(178.6,43.5)
NetC87_1: C87.1 R65.2 ZQ3.3 | length 3.6
  Top Layer w0.3: R65.2@169.3,48.75 170.825,48.75 ZQ3.3@170.975,48.9 171.05,48.975 C87.1@171.05,50.7
NetC97_1: C97.1 DD13.3 | length 2.4
  Top Layer w0.3: DD13.3@14.6,41.6 15.648,41.6 16.1,41.148 16.1,40.875 16.375,40.6 C97.1@16.425,40.6
NetC99_2: C99.2 R72.1 R76.1 U5.2 | length 5.3
  Top Layer w0.5: R72.1@12.991,30.075 13.041,30.125 R76.1@14.341,30.125 ; R76.1@14.391,30.125 C99.2@15.841,30.125 ; C99.2@15.866,30.15 U5.2@18.3,30.15
NetC100_1: C100.1 DD13.9 | length 3.4
  Top Layer w0.3: DD13.9@10,41.1 10.975,41.1 11.275,40.8 C100.1@11.275,38.75
NetC100_2: C100.2 DD13.2 | length 3.7
  Top Layer w0.3: C100.2@12.825,38.75 12.825,40.364 13.561,41.1 DD13.2@14.6,41.1
NetC104_1: C104.1 DA18.3 R88.2 R92.1 | length 5
  Top Layer w0.5: R88.2@34.25,25.632 34.275,25.657 36.025,25.657 C104.1@36.05,25.682 R92.1@36.05,27.132 36.05,28.532 36.025,28.557 DA18.3@35.725,28.557
NetC108_1: C108.1 DA18.4 R90.2 R93.2 | length 7.2
  Top Layer w0.3: R93.2@37.6,31.882 37.325,31.607 37.325,31.316 36.8,30.791 36.8,29.532 37.425,28.907 37.425,28.682 37.55,28.557 DA18.4@37.875,28.557
  Top Layer w0.5: R93.2@37.6,31.882 C108.1@37.6,33.332 R90.2@37.6,34.782
NetC108_2: C108.2 DA18.1 R93.1 R94.1 | length 12.7
  Top Layer w0.3: R94.1@40.857,34.8 R94.1@40.875,34.782
  Top Layer w0.5: v1(34.275,32.632) 34.975,33.332 C108.2@36.05,33.332 R93.1@36.05,31.882 36.05,30.582 35.925,30.457 DA18.1@35.725,30.457 ; v1(39.5,34.8) R94.1@40.857,34.8
  GND Layer w0.5: v1(34.275,32.632) 36.443,34.8 v1(39.5,34.8)
NetC116_1: C116.1 DA21.3 R99.2 | length 7.4
  Top Layer w0.3: C116.1@10.575,20.8 11.7,20.8 12.65,19.85 14.075,19.85 14.658,20.433 DA21.3@14.658,21.5 ; DA21.3@14.658,21.725 14.783,21.85 R99.2@16.2,21.85
NetDA4A1_6: DA4A1.6 R12A1.1 | length 2.2
  Top Layer w0.5: R12A1.1@76.358,41.158 76.5,41.3 76.5,41.701 76.85,42.051 76.85,43.055 DA4A1.6@76.9,43.105
NetDA4A2_6: DA4A2.6 R12A2.1 | length 2.3
  Top Layer w0.5: R12A2.1@63.55,41.125 63.725,41.3 63.775,41.3 63.775,41.701 64.116,42.042 64.116,43.056 DA4A2.6@64.166,43.106
NetDA4A3_6: DA4A3.6 R12A3.1 | length 2.3
  Top Layer w0.5: R12A3.1@50.825,41.125 50.875,41.125 51.05,41.3 51.05,41.687 51.4,42.037 51.4,43.055 DA4A3.6@51.45,43.105
NetDA5A1_3: DA5A1.3 R16A1.2 | length 4.1
  Top Layer w0.5: R16A1.2@79,33.675 79.3,33.975 DA5A1.3@79.3,37.7
NetDA5A2_3: DA5A2.3 R16A2.2 | length 4.8
  Top Layer w0.5: R16A2.2@65.836,33.186 66.5,33.85 DA5A2.3@66.5,37.7
NetDA5A3_3: DA5A3.3 R16A3.2 | length 4.8
  Top Layer w0.5: R16A3.2@53.075,33.25 53.175,33.25 53.75,33.825 DA5A3.3@53.75,37.7
NetDA6_4: DA6.4 DD3.2 | length 2.5
  Top Layer w0.5: DA6.4@151.625,21.9 151.95,21.9 151.975,21.875 DD3.2@151.975,19.7
NetDA8_1: DA8.1 DA8.4 R20.2 | length 4.9
  Top Layer w0.3: R20.2@146.725,5.925 146.6,6.05 146.6,7.9 146.725,8.025 147.149,8.025 148.375,9.251 148.375,9.6 DA8.1@148.5,9.725
NetDA9_3: DA9.3 R20.1 R25.1 | length 4.6
  Top Layer w0.5: R20.1@146.625,4.375 R20.1@146.725,4.375 R25.1@148.125,4.375 ; v1(148.175,3.4) R25.1@148.175,4.375
  Bottom Layer w0.3: v1(148.175,3.4) 148.175,3.9 148.707,4.432 149.532,4.432 DA9.3@149.575,4.475
NetDA10A7_4: DA10A7.4 DD9A7.4 | length 3.4
  Bottom Layer w0.5: DD9A7.4@72.515,20 DA10A7.4@72.515,23.36
NetDA10A8_4: DA10A8.4 DD9A8.4 | length 3.4
  Bottom Layer w0.5: DD9A8.4@42.8,20 DA10A8.4@42.8,23.375
NetDA14A7_1: DA14A7.1 DA14A7.4 XP5A7.5 | length 12.9
  Bottom Layer w0.3: XP5A7.5@79.175,3.625 79.175,5.175 81.134,7.134 83.484,7.134 84.35,8 DA14A7.1@84.35,9.225 ; DA14A7.1@84.475,9.225 85.251,9.225 85.427,9.401 85.427,10.912 85.603,11.088 86.588,11.088 DA14A7.4@86.606,11.106
NetDA14A8_1: DA14A8.1 DA14A8.4 XP5A8.5 | length 12.7
  Bottom Layer w0.3: XP5A8.5@49.45,3.625 49.45,5.301 51.174,7.024 53.229,7.024 54.35,8.145 DA14A8.1@54.35,9.225 55.252,9.225 55.428,9.401 55.428,10.949 55.604,11.125 DA14A8.4@56.5,11.125
NetDA15_1: DA15.1 DA15.4 R41.1 | length 5.7
  Top Layer w0.3: DA15.4@121.637,18.913 121.954,18.913 122.079,18.788 122.079,18.196 123.137,17.138 123.662,17.138 DA15.1@123.787,17.013 123.868,16.933 124.618,16.933 124.987,16.563 ; R41.1@125,15.55 125,16.563
NetDA16_3: DA16.3 R41.2 R42.1 | length 3.1
  Top Layer w0.5: R42.1@122.1,15.55 R41.2@123.45,15.55 123.45,14.125 123.475,14.1 DA16.3@123.8,14.1
NetDA21_4: DA21.4 R109.2 R113.1 | length 3.2
  Top Layer w0.3: DA21.4@14.658,23.65 14.658,25.197 R113.1@14.505,25.35 15.949,25.35 R109.2@15.966,25.333
NetDD1_37: DD1.37 R4.1 | length 2.8
  Top Layer w0.3: DD1.37@105.075,33.5 106.302,33.5 106.452,33.35 v1@106.529,33.35
  Bottom Layer w0.3: v1@106.529,33.35 106.586,33.407 107.611,33.407 R4.1@107.759,33.556
  other v1: 106.525,33.35
NetDD1_94: DD1.94 R5.1 | length 2.7
  Top Layer w0.3: v1(118.725,36) 119.5,36 DD1.94@120.125,36
  Bottom Layer w0.3: R5.1@118.575,34.8 118.65,34.875 118.65,35.925 v1(118.725,36)
NetDD3_6: DD3.6 R19.1 | length 2
  Top Layer w0.5: R19.1@150.675,11.7 DD3.6@150.675,13.7
NetDD3_7: DD3.7 DD4.2 | length 4.4
  Top Layer w0.5: DD4.2@150.85,9.725 150.875,9.75 150.875,10.45 151.975,11.55 DD3.7@151.975,13.7
NetDD4_4: DD4.4 R23.2 | length 1.8
  Top Layer w0.3: R23.2@149.625,5.925 149.9,6.2 DD4.4@149.9,7.575
NetDD5_3: DD5.3 R22.2 XP4.1 | length 6.9
  Top Layer w0.3: XP4.1@135.956,3.7 135.956,6.85 136.231,7.124 R22.2@136.231,7.875 136.184,7.922 136.184,10.272 DD5.3@136.046,10.41
NetDD5_4: DD5.4 R24.2 XP4.2 | length 14.4
  Top Layer w0.3: R24.2@132.931,4.95 132.931,3.725 134.956,1.7 135.956,1.7 136.98,2.724 136.98,4.599 137.316,4.935 DD5.4@137.316,10.41
NetDD5_5: DD5.5 R26.2 XP4.3 | length 7
  Top Layer w0.3: XP4.3@137.956,3.7 137.956,6.075 138.406,6.525 R26.2@138.406,7.875 138.586,8.055 DD5.5@138.586,10.41
NetDD5_6: DD5.6 XP4.4 | length 9.5
  Top Layer w0.3: XP4.4@137.956,1.7 138.956,2.7 138.956,4.4 139.185,4.629 139.185,8.527 139.706,9.049 139.706,10.26 DD5.6@139.856,10.41
NetDD6_11: DD6.11 R21.1 XP4.7 | length 12.8
  Top Layer w0.5: XP4.7@141.95,3.625 142.084,3.491 142.577,3.491 142.593,3.475 R21.1@144.925,3.475 ; R21.1@144.975,3.475 v1(144.975,4.45)
  Bottom Layer w0.5: DD6.11@139.856,10.41 DD6.11@139.856,10.4 139.856,8.375 141.081,7.15 142.275,7.15 v1(144.975,4.45)
NetDD6_12: DD6.12 R21.2 XP4.8 | length 16.8
  Top Layer w0.5: XP4.8@141.95,1.625 142.139,1.625 142.439,1.925 R21.2@144.975,1.925 v1(144.975,0.95)
  Bottom Layer w0.5: DD6.12@138.586,10.41 DD6.12@138.586,10.4 138.586,8.043 141.455,5.175 142.45,5.175 144.975,2.65 v1(144.975,0.95)
NetDD7A7_4: DD7A7.4 DD10A7.2 | length 5.3
  Top Layer w0.3: DD7A7.4@80.65,11.25 80.65,12.164 80.911,12.425 83.275,12.425 83.625,12.775 DD10A7.2@83.625,13.975
NetDD7A8_4: DD7A8.4 DD10A8.2 | length 5.2
  Top Layer w0.3: DD7A8.4@50.55,11.25 50.55,12.224 50.726,12.4 53.119,12.4 53.375,12.656 DD10A8.2@53.375,13.85